# Altium PCB BigSwitch.PcbDoc
Units mm, origin at the board's own origin, x right, y up, seen from the top; angles counter-clockwise.
Board outline 87 x 75 mm, 2 copper layers (Top Layer, Bottom Layer); 8 components, 5 nets, 19 pads, 1 vias.
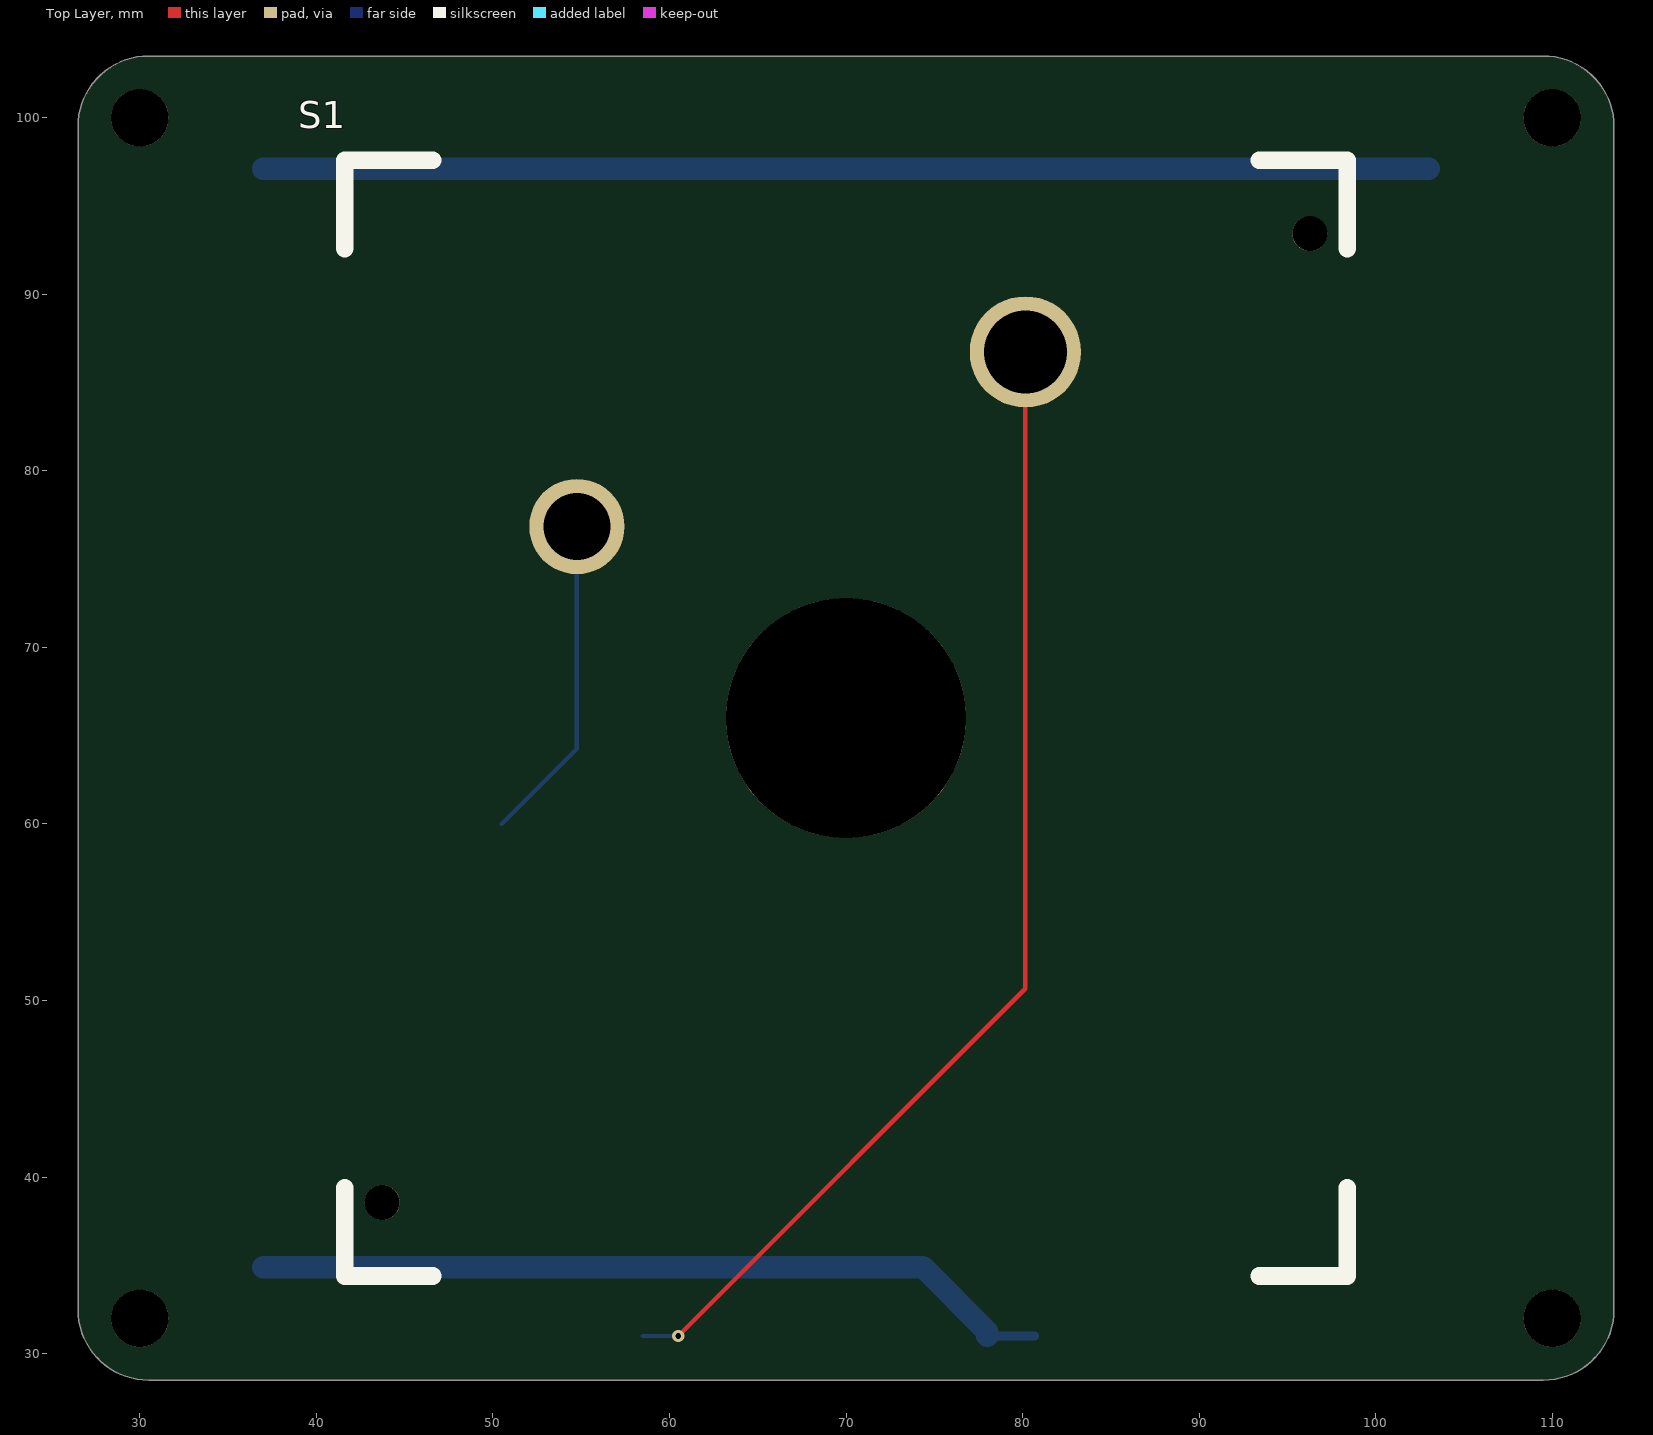
[diagram p0: Top Layer view]
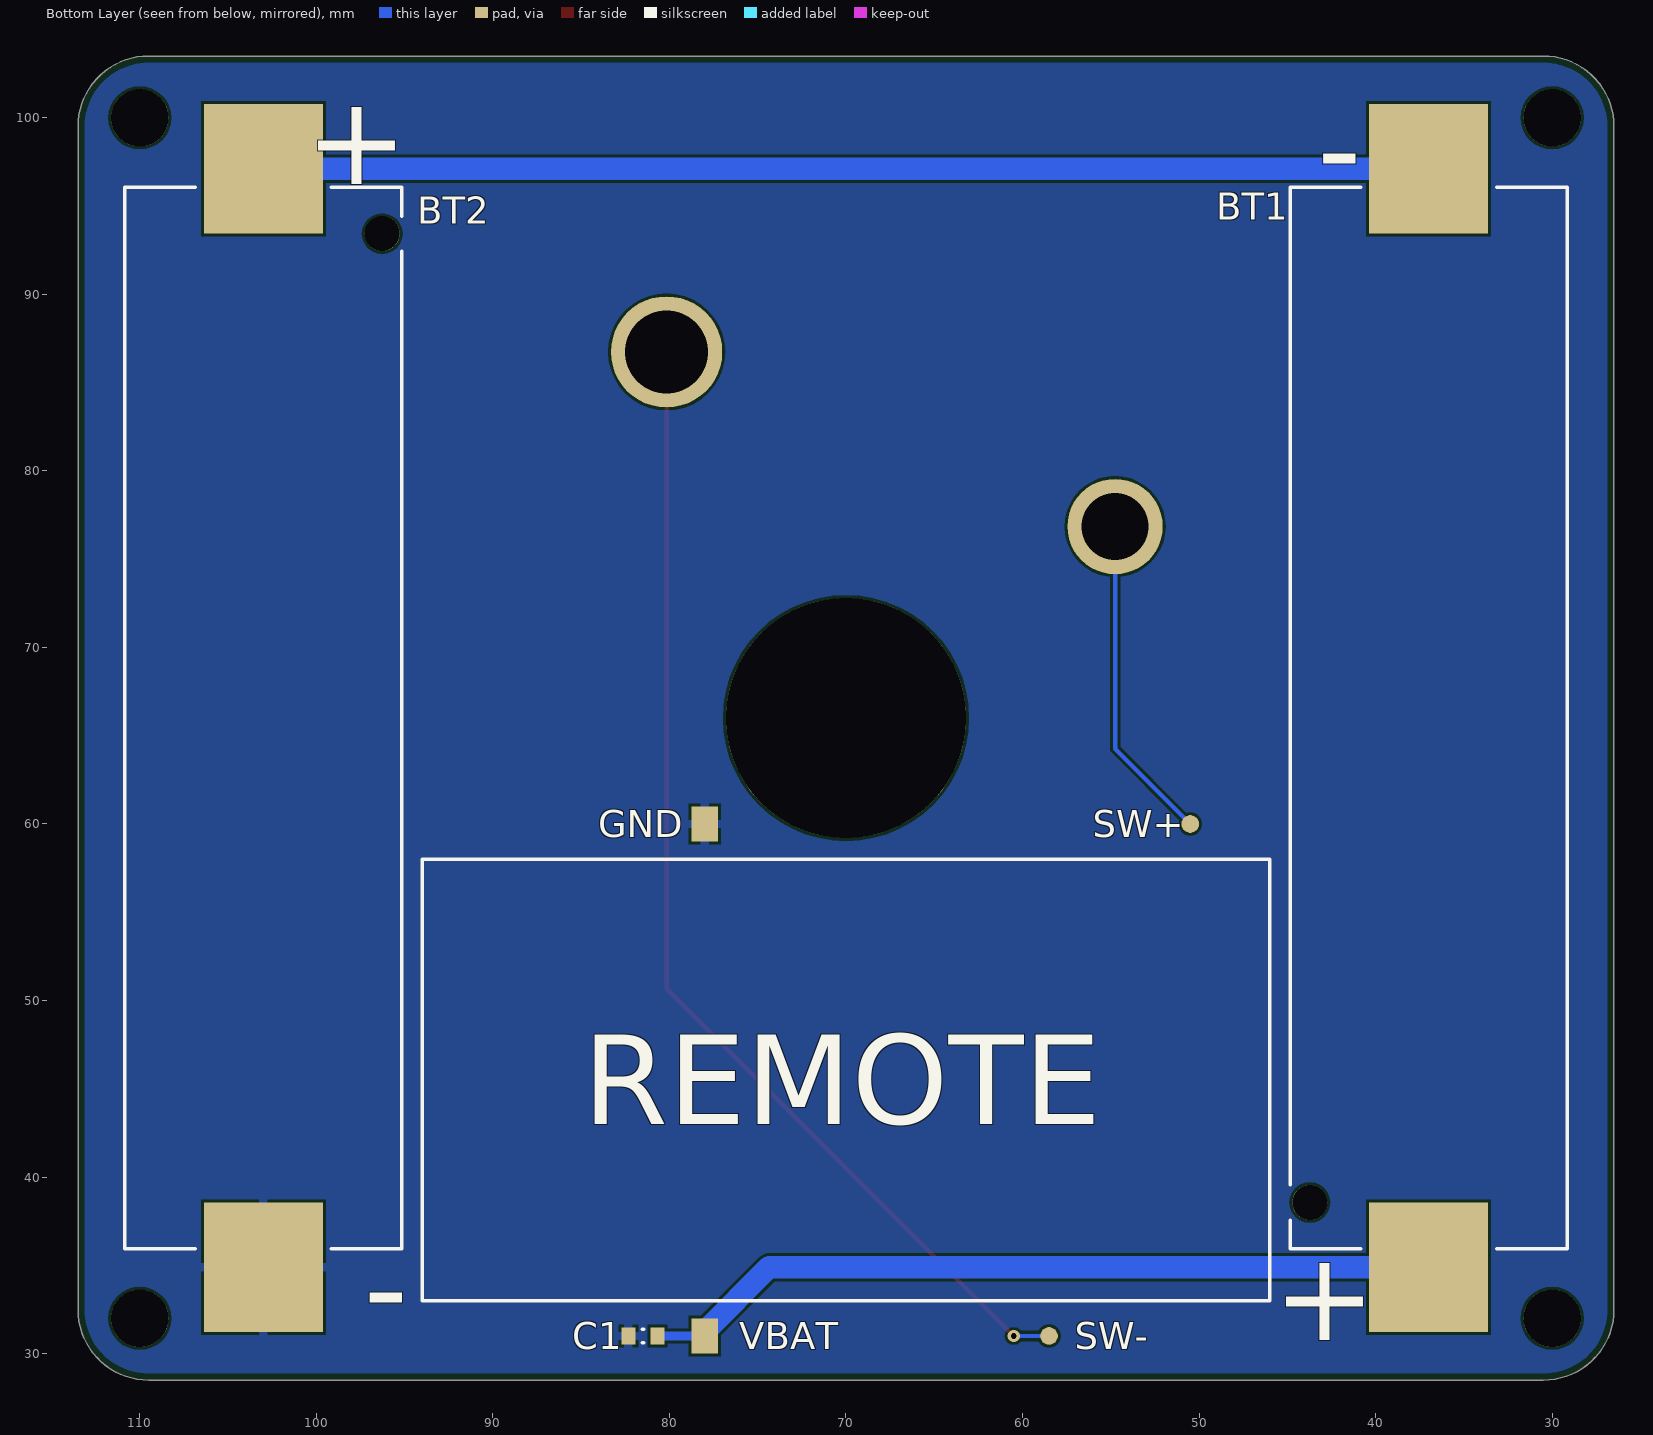
[diagram p1: Bottom Layer view, seen from below]
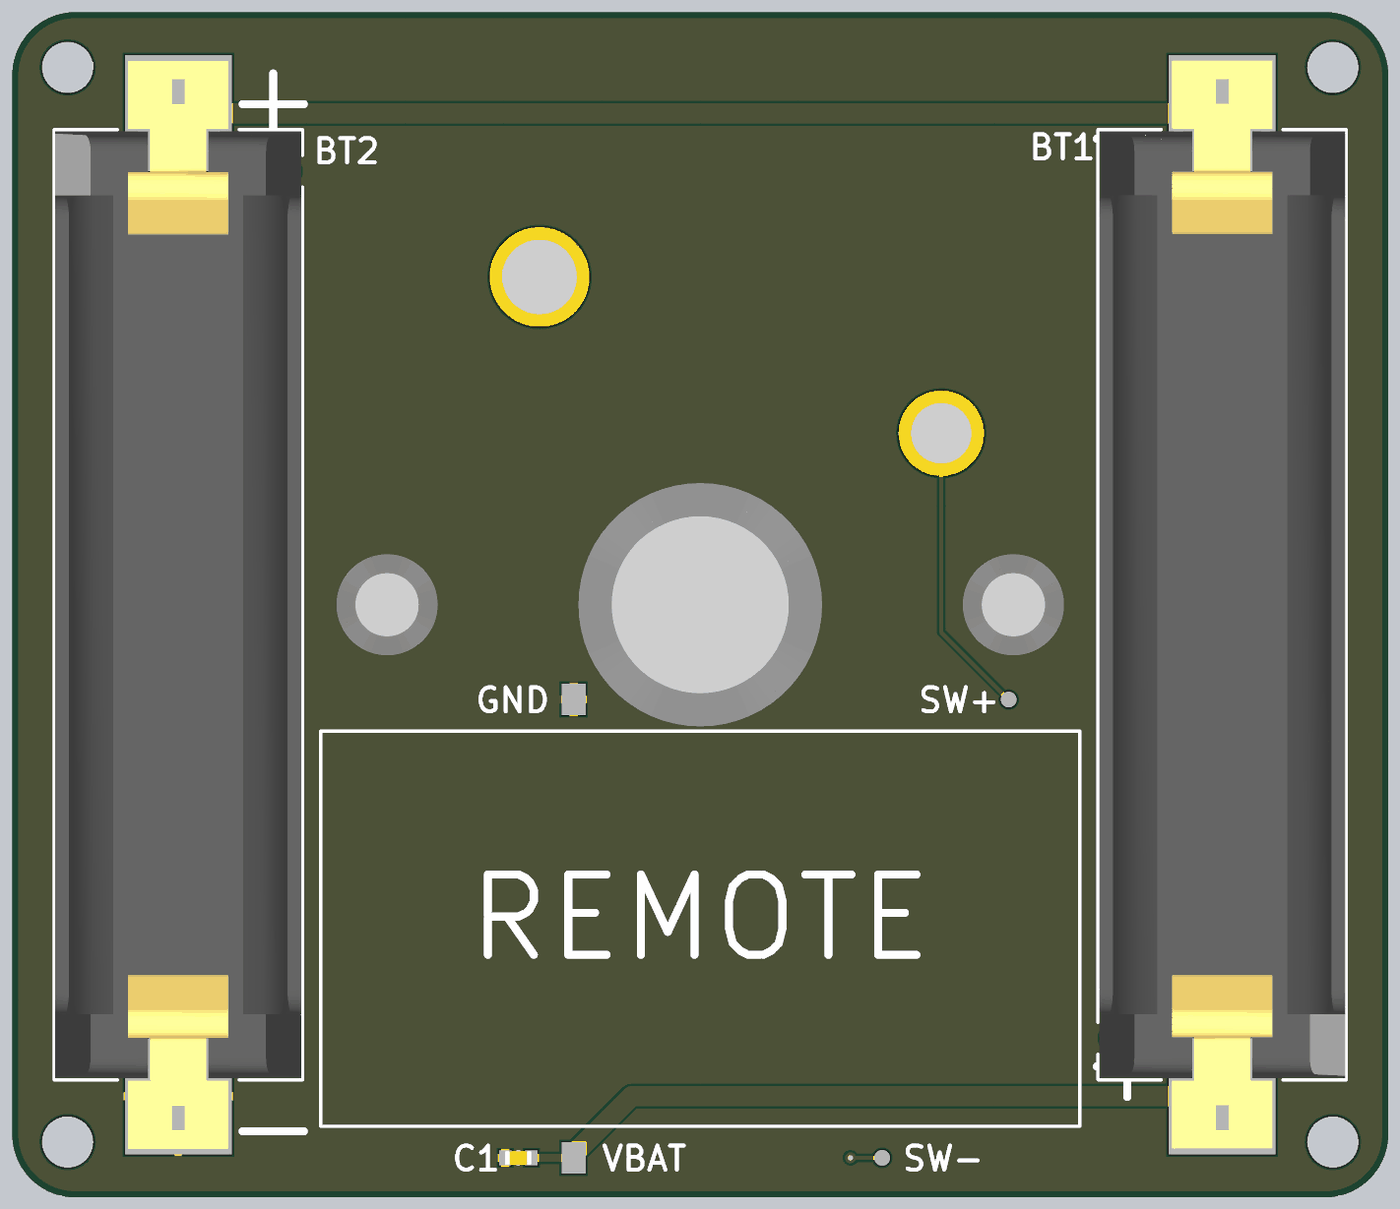
[diagram p2: 3D render of the assembled board from below, using the file's embedded part models]

## Layer stack, top to bottom
Top Solder: solder mask 0.0102, Solder Resist, Dk 3.5
Top Layer: signal copper 0.0356
Dielectric 1: dielectric 0.32, FR-4, Dk 4.8
Bottom Layer: signal copper 0.0356
Bottom Solder: solder mask 0.0102, Solder Resist, Dk 3.5

## Board outline
26.5,32.5 26.5,99.5 cw(c30.5,99.5) 30.5,103.5 109.5,103.5 cw(c109.5,99.5) 113.5,99.5 113.5,32.5 cw(c109.5,32.5) 109.5,28.5 30.5,28.5 cw(c30.5,32.5)

## Design rules (kind name [scope] priority, off if disabled: settings)
BoardOutlineClearance [All] p1: gap=0.381 ignorepadtopadclearanceinfootprint=FALSE
Clearance [All] p1: gap=0.152 ignorepadtopadclearanceinfootprint=FALSE except(0: Arc-Hole Track-Hole SMDPad-Hole THPad-Hole Via-Hole Fill-Hole Poly-Hole Region-Hole Text-Hole)
ComponentClearance [All] p1: gap=0.025 collisioncheckmode=3 verticalgap=0.025 showdistances=FALSE
DiffPairsRouting [All] p1: maxlimit=10 minlimit=0.152 mostfreqgap=0.203 toplayer_minwidth=0.152 toplayer_maxwidth=0.381 toplayer_prefwidth=0.203 bottomlayer_minwidth=0.152 bottomlayer_maxwidth=0.381 bottomlayer_prefwidth=0.203 maxuncoupledlength=12.7
HoleSize [All] p1: absolutevalues=TRUE maxlimit=6.731 minlimit=0.33 maxpercent=80.000 minpercent=20.000
HoleToHoleClearance [All] p1: gap=0.254 allowstackedmicrovias=FALSE
MinimumAnnularRing [All] p1: minimumring=0.178
MinimumSolderMaskSliver [All] p1: minsoldermaskwidth=0
PlaneClearance [All] p1: clearance=0.254
PlaneConnect [All] p1: planeconnectstyle=Direct reliefexpansion=0.406 reliefentries=4 reliefconductorwidth=0.152 reliefairgap=0.152
PolygonConnect [All] p1: connectstyle=Relief reliefconductorwidth=0.508 reliefentries=4 polygonreliefangle="90 Angle" airgapwidth=0.152
RoutingCorners [All] p1: cornerstyle=45-Degree minsetback=1.25 maxsetback=1.25
RoutingVias [All] p1: holewidth=0.381 width=0.762 viastyle="Through Hole" minholewidth=0.33 minwidth=0.686 maxholewidth=2.54 maxwidth=2.896
SilkToSilkClearance [All] p1: silktosilkclearance=0
SilkToSolderMaskClearance [IsPad] p1: minsilkscreentomaskgap=0.152 clearancetoexposedcopper=TRUE
SolderMaskExpansion [All] p1: expansion=0.075 istentingtop=FALSE
Width [All] p1: maxlimit=10.16 minlimit=0.152 preferedwidth=0.203
20 further rules are at their usual default settings.

## Classes and differential pairs
component class BigSwitch: C1 GND S1 SW+ SW- VBAT

## Components (designator, comment, footprint, x,y, rotation, side; value= is the part's Value field where it differs from the comment)
BT1 "1024" 1024 37,66 r90 bottom
BT2 "1024" 1024 103,66 r270 bottom
C1 "Capacitor" CAPC1608X09N 81.5,31 r180 bottom value=0.1uF
GND "Test Point" TP_RECTANGULAR_1.5X2MM 78,60 r180 bottom (schematic designator TP4)
S1 "COM-14583" CPG151101D228 70,66 r0 top
SW+ "Test Point" TP_CIRCULAR_SMD_1MM 50.5,60 r90 bottom (schematic designator TP2)
SW- "Test Point" TP_CIRCULAR_SMD_1MM 58.5,31 r90 bottom (schematic designator TP3)
VBAT "Test Point" TP_RECTANGULAR_1.5X2MM 78,31 r180 bottom (schematic designator TP1)

## Footprints (in the part's own frame and the unit in brackets; to place one, negate y for a bottom-side part, rotate by r counter-clockwise, add the part's x,y. Pads: shape width x height; smd on the part's side, far side on the other; paste and mask are expansions set on the pad)
1024 [mm] "BATTERY HOLDER AA 1 CELL SMD TAB"
  rect 7.34x6.75 smd: B+(-31.105,0) B-(31.105,0)
  round 1.98 hole 1.98: ""(-27.435,6.73)
  silkscreen extent -30.06,-7.85 30.06,7.85, body extent -34.42,-7.77 34.44,7.77, height 14.87
CAPC1608X09N [mm] "Chip Capacitor, 2-Leads, Body 1.60x0.80mm, IPC Medium Density"
  rect 0.8x0.95 smd: 1(-0.825,0) 2(0.825,0)
  silkscreen extent -0.05,-0.38 0.05,0.38, body extent -0.85,-0.45 0.85,0.45, height 0.9
CPG151101D228 [mm] "NOVELKEYS BIG SWITCH BURNT ORANGE"
  round 5.4 hole 3.8: 1(-15.24,10.85)
  round 6.3 hole 4.7: 2(10.16,20.74)
  round 13.6 hole 13.6: ""(0,0)
  silkscreen extent -28.4,-31.6 28.4,31.6, body extent -31.28,-32.66 31.28,32.66, height 59.4
TP_CIRCULAR_SMD_1MM [mm]
  round 1 smd: 1(0,0)
TP_RECTANGULAR_1.5X2MM [mm]
  rect 1.5x2 smd mask+0.05: 1(0,0)

## Part data
BT1 BT2: "HOLDER BATTERY AA SMD", Manufacturer="Keystone Electronics", Max Operating Temperature=145°C, Min Operating Temperature=-50°C, Package Quantity=1, Body Material=Nylon,Polypropylene, Category="Batteries and Accessories", ComponentLink1Description=https://datasheet.ciiva.com/4642/m60p19-19340-4642624.pdf?src-supplier=Mouser, ComponentLink1URL=https://datasheet.ciiva.com/4642/m60p19-19340-4642624.pdf?src-supplier=Mouser, ComponentLink2Description=https://datasheet.ciiva.com/1437/m60p19-1437441.pdf?src-supplier=Newark, ComponentLink2URL=https://datasheet.ciiva.com/1437/m60p19-1437441.pdf?src-supplier=Newark, ComponentLink3Description=https://datasheet.ciiva.com/4/1024-4186.pdf?src-supplier=Digi-Key, ComponentLink3URL=https://datasheet.ciiva.com/4/1024-4186.pdf?src-supplier=Digi-Key, Contact Material=Bronze, Contact Plating=Gold, Lead Free="Lead Free", Manufacturer Part Number=1024, Material=Nylon, Mount="Surface Mount,PCB", Number of Batteries=1, Number of Cells=1, Packaging=Tray, Pricing 1="1=2.88000, 25=2.42240, 100=2.12000, 250=2.02624, 500=1.87000, 1000=1.70001, 2500=1.46300, 5000=1.42000 (USD)", REACH SVHC="No SVHC", RoHS=Yes, Stock 1=7804, Supplier 1=Digi-Key, Termination=SMD/SMT, Wire/Cable Gauge=26AWG
C1: "General purpose capacitor", Package=0603, Rated Voltage=50V
GND SW+ SW- VBAT: "General purpose test point"
S1: "Novelkeys Big Switch - Tactile", Manufacturer=SparkFun, Category="Pushbutton Switches", Manufacturer Part Number=COM-14583, Pricing 1="1=33.75000 (USD)", RoHS=No, Stock 1=5, Supplier 1=Digi-Key

## Free pads (board coordinates)
  round 3.25 hole 3.25 unplated: ""(30,32) ""(30,100) ""(110,32) ""(110,100)

## Via types
v1: diameter 0.686, hole 0.33, Top Layer to Bottom Layer, tented both sides, 1 vias

## Nets (pads, with @x,y where several pads share a name; then routed paths per layer and width w, separated by ;. In a path a pad name is that pad's centre, name@x,y a point inside that pad or via, vN(x,y) a via of type N, cw(c..) or ccw(c..) an arc to the next point about the centre after c; other vN are vias at no path point)
BMID: BT1.B- BT2.B+ | length 66
  Bottom Layer w1.27: BT1.B- BT2.B+
GND: BT2.B- C1.1 GND.1
NetS1_1: S1.1 SW+.1 | length 18.6
  Bottom Layer w0.254: SW+.1 54.76,64.26 S1.1
NetS1_2: S1.2 SW-.1 | length 65.9
  Top Layer w0.254: v1(60.5,31) 80.16,50.66 S1.2
  Bottom Layer w0.254: SW-.1 v1(60.5,31)
VBAT: BT1.B+ C1.2 VBAT.1 | length 45.4
  Bottom Layer w0.508: VBAT.1 C1.2
  Bottom Layer w1.27: BT1.B+ 74.355,34.895 78,31.25 VBAT.1
pads on no net: BT1. BT2. S1.

## Polygon pours and split planes (outlines as drawn)
GND on Bottom Layer "NONET_L-01_P-001" (solid, pour order 1): 26.5,28.5 26.5,103.5 113.5,103.5 113.5,28.5

## Silkscreen, mask and mechanical layers (free items; w line width, h text height)
Bottom Overlay:
  lines w0.2: 46,33 94,33 94,58 46,58 46,33
  text "+" at 94.799,96.25 h5.08
  text "-" at 40.799,95.75 h5.08
  text "REMOTE" at 84.897,43 h5.08
  text "-" at 94.799,31.25 h5.08
  text "+" at 39.953,30.75 h5.08
Mechanical 1:
  the board outline again, w0.1